# Altium PCB ESB32 with USBC PCB V1-1.PcbDoc (part 1 of 3)
Units mil, origin at the board's own origin, x right, y up, seen from the top; angles counter-clockwise.
Board outline 2700 x 1000 mil, 4 copper layers (L1, L2, L3, L4), stack 61.583 mil thick; 64 components, 73 nets, 299 pads, 161 vias.
Unrouted connection lines stored in the file: 13.
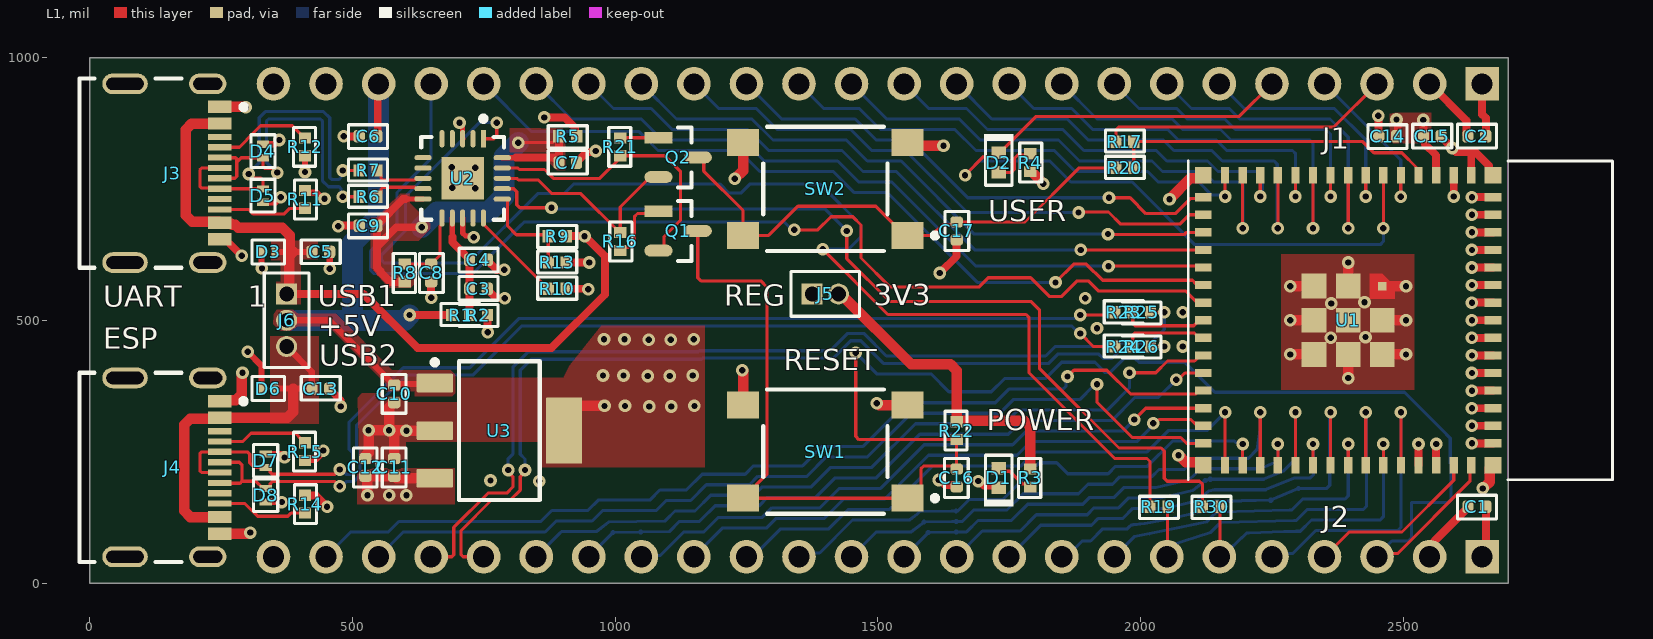
[diagram p0: L1 view]
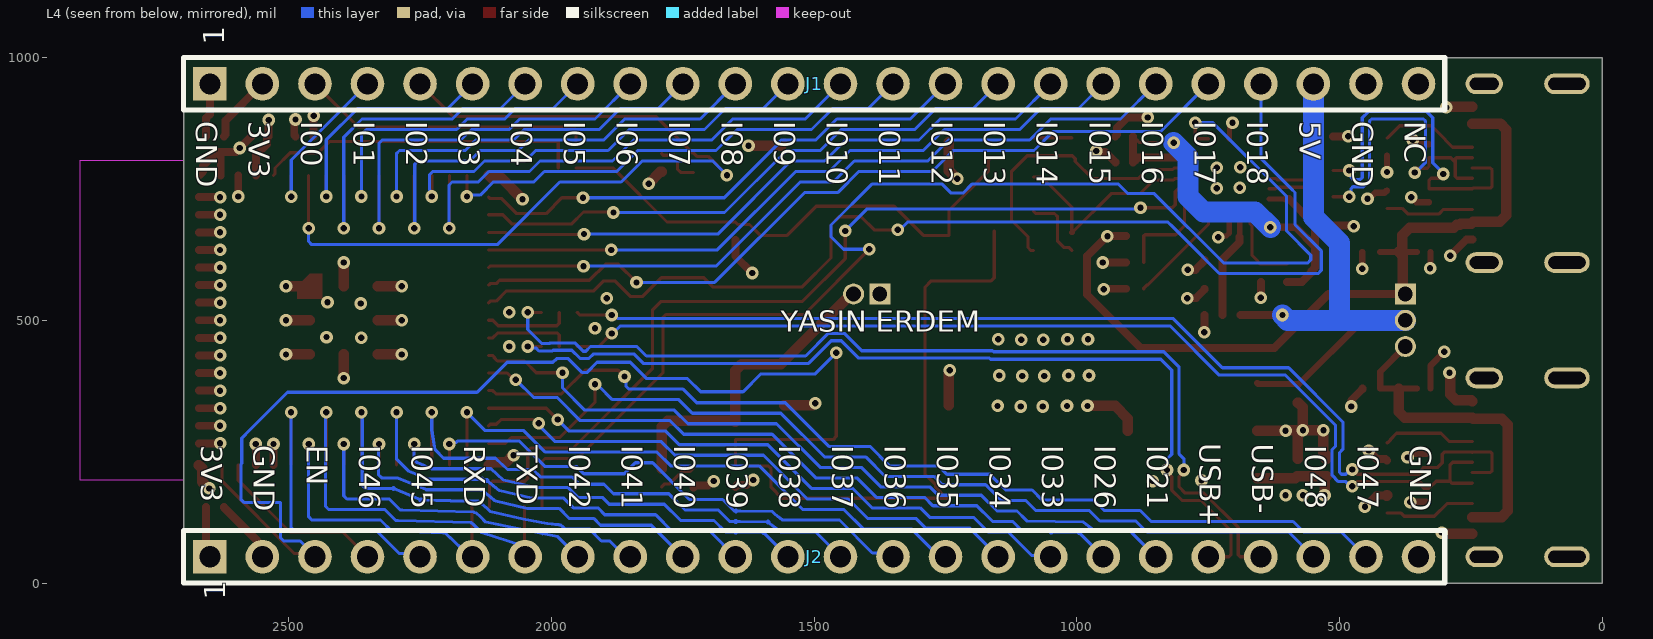
[diagram p1: L4 view, seen from below]
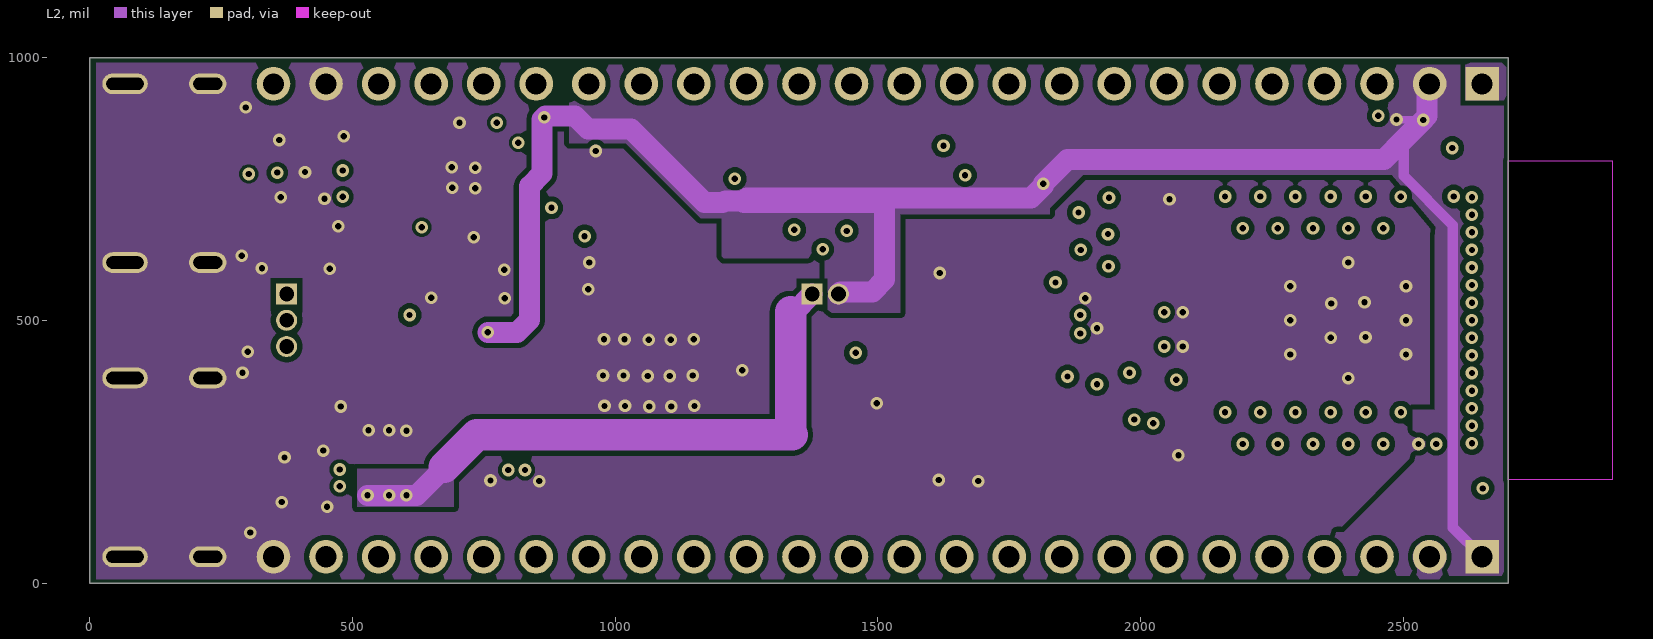
[diagram p2: L2]
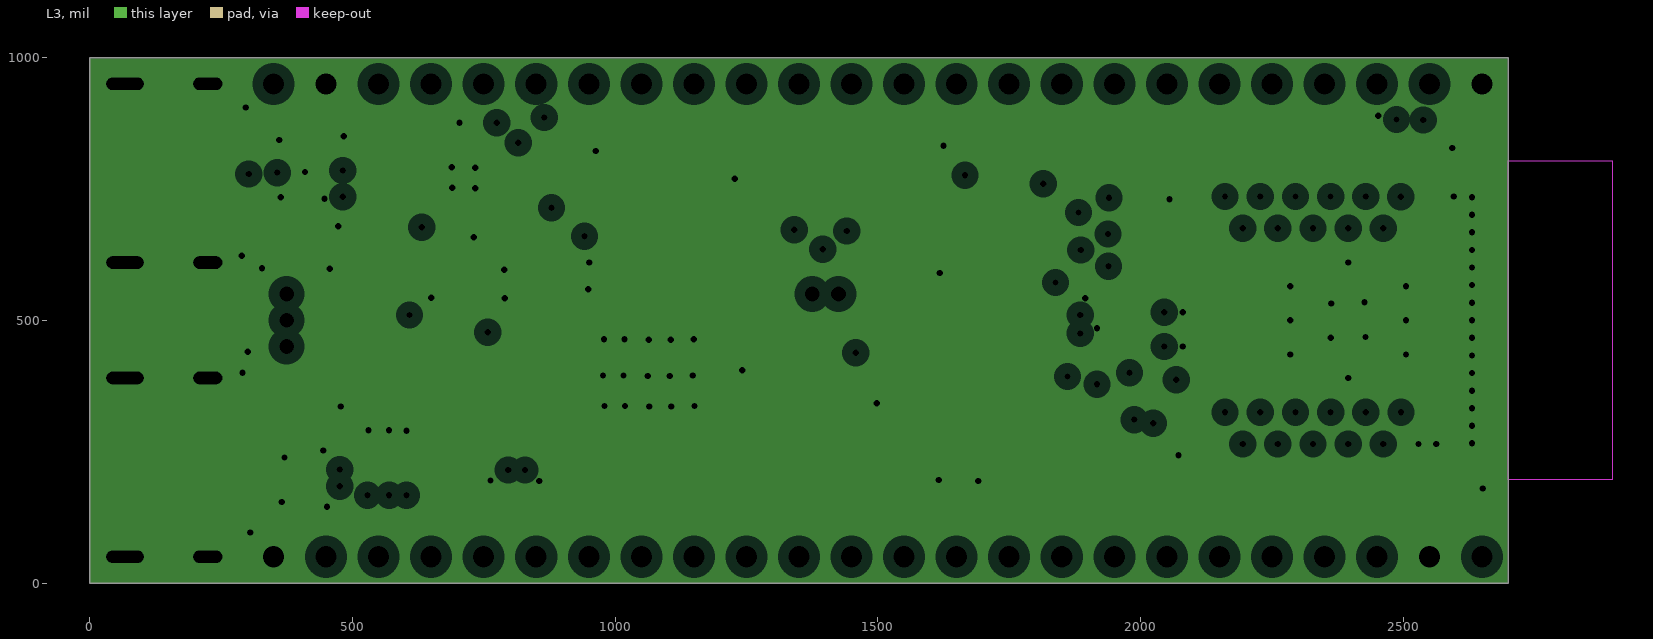
[diagram p3: L3, clearances drawn from the general rule]
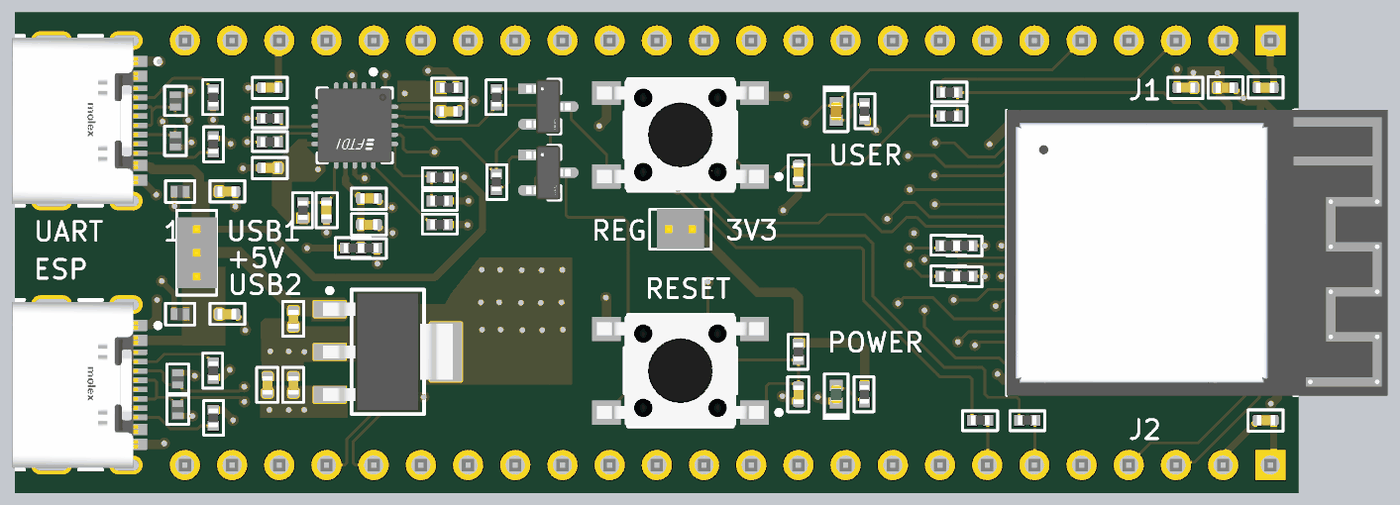
[diagram p5: 3D render of the assembled board from above, using the file's embedded part models]

## Layer stack, top to bottom
Top Solder: solder mask 0.4, Solder Resist, Dk 3.5
L1: signal copper 1.378
Dielectric 2: prepreg 3.9134, PP-006, Dk 4.1
L2: signal copper 0.5984
Dielectric 1: dielectric 49.8031, FR-4, Dk 4.8
L3: plane copper 0.5984, net GND
Dielectric 3: prepreg 3.9134, PP-006, Dk 4.1
L4: signal copper 1.378
Bottom Solder: solder mask 0.4, Solder Resist, Dk 3.5

## Board outline
0,0 2700,0 2700,1000 0,1000

## Design rules (kind name [scope] priority, off if disabled: settings)
Clearance SMALLER [WithinRoom('FTDI')    or WithinRoom('USBC2')     or WithinRoom('USBC1')] p1: gap=6 ignorepadtopadclearanceinfootprint=FALSE
Clearance "DIFF90 Clearance" [InDifferentialPairClass('DIFF90')] p2: gap=8 ignorepadtopadclearanceinfootprint=FALSE
Clearance [All] p3: gap=10 ignorepadtopadclearanceinfootprint=FALSE except(6: SMDPad-SMDPad)
ComponentClearance r24r26 [InComponent('R24') vs InComponent('R26')] p1: gap=-1 collisioncheckmode=3 verticalgap=-1 showdistances=FALSE
ComponentClearance r23r25 [InComponent('R23') vs InComponent('R25')] p2: gap=-1 collisioncheckmode=3 verticalgap=-1 showdistances=FALSE
ComponentClearance r1r2 [InComponent('R1') vs InComponent('R2')] p3: gap=-1 collisioncheckmode=3 verticalgap=-1 showdistances=FALSE
ComponentClearance [All] p4: gap=10 collisioncheckmode=3 verticalgap=10 showdistances=FALSE
DiffPairsRouting DIFF90 [InDifferentialPairClass('DIFF90')] p1: maxlimit=8.1 minlimit=8 mostfreqgap=8 toplayer_minwidth=6.03 toplayer_maxwidth=6.23 toplayer_prefwidth=6.03 midlayer1_minwidth=5.1 midlayer1_maxwidth=5.2 midlayer1_prefwidth=5.1 bottomlayer_minwidth=6.03 bottomlayer_maxwidth=6.23 bottomlayer_prefwidth=6.03 maxuncoupledlength=500
MinimumSolderMaskSliver [All] p1: minsoldermaskwidth=3.15
PlaneClearance [All] p1: clearance=20
PlaneConnect [All] p1: pad.planeconnectstyle=Relief pad.reliefexpansion=20 pad.reliefentries=4 pad.reliefconductorwidth=20 pad.reliefairgap=10 via.planeconnectstyle=Direct via.reliefexpansion=20 via.reliefentries=4 via.reliefconductorwidth=10 via.reliefairgap=10
PolygonConnect [All] p1: connectstyle=Direct reliefconductorwidth=10 reliefentries=4 polygonreliefangle="90 Angle" airgapwidth=10
RoomDefinition FTDI [False vs False] p1: confinementstyle=ConfineIn formatcopy=TRUE lockcomponents=FALSE outline 592,877 818,877 818,650 592,650
RoomDefinition USBC1 [False vs False] p2: confinementstyle=ConfineIn formatcopy=TRUE lockcomponents=FALSE outline 189,925 307,925 307,633 189,633
RoomDefinition USBC2 [False vs False] p3: confinementstyle=ConfineIn formatcopy=TRUE lockcomponents=FALSE outline 194,365 320,365 320,78 194,78
RoutingVias [All] p1: holewidth=12 width=24 viastyle="Through Hole" minholewidth=12 minwidth=24 maxholewidth=12 maxwidth=24
SilkToSilkClearance [All] p1: silktosilkclearance=6
SilkToSolderMaskClearance [IsPad] p1: minsilkscreentomaskgap=5 clearancetoexposedcopper=TRUE
SolderMaskExpansion [All] p1: expansion=2 istentingtop=FALSE
SupplyNets "Schematic Supply Nets_5" [InNet('+5VBUS_1')] p1: voltage=0.000
SupplyNets "Schematic Supply Nets_4" [InNet('+5V')] p2: voltage=0.000
SupplyNets "Schematic Supply Nets_3" [InNet('+3V3')] p3: voltage=0.000
SupplyNets "Schematic Supply Nets_2" [InNet('GND')] p4: voltage=0.000
SupplyNets "Schematic Supply Nets_1" [InNet('+5VBUS_2')] p5: voltage=0.000
SupplyNets "Schematic Supply Nets" [InNet('+3V3_REG')] p6: voltage=0.000
Width [All] p1: maxlimit=100 minlimit=6 preferedwidth=10 minimp=50.000000 maximp=50.000000 favimp=50.000000
23 further rules are at their usual default settings.

## Classes and differential pairs
differential pair class DIFF90: CON1_USB CON2_USB CON_ESP_USB ESP_USB FTDI_USB
differential pair FTDI_USB: +FTDI_USB_P -FTDI_USB_N
differential pair ESP_USB: +ESP_USB_P -ESP_USB_N
differential pair CON_ESP_USB: +CON_ESP_USB_P -CON_ESP_USB_N
differential pair CON2_USB: +CON2_USB_P -CON2_USB_N
differential pair CON1_USB: +CON1_USB_P -CON1_USB_N

## Components (designator, comment, footprint, x,y, rotation, side; value= is the part's Value field where it differs from the comment)
C1 "100nf ,50V" CAPC1005X55N 2640,145 r180 top
C2 "100nf ,50V" CAPC1005X55N 2640,850 r0 top
C3 "100nf ,50V" CAPC1005X55N 740,560 r0 top
C4 "4u7,16V" CAPC1005X55N 740,615 r180 top value=4.7uF
C5 "100nf ,50V" CAPC1005X55N 440,630 r0 top
C6 "100nf ,50V" CAPC1005X55N 530,850 r180 top
C7 "100nf ,50V" CAPC1005X55N 910,800 r0 top
C8 "100nf ,50V" CAPC1005X55N 650,590 r270 top
C9 "100nf ,50V" CAPC1005X55N 530,680 r180 top
C10 "4u7,16V" CAPC1005X55N 580,360 r90 top value=4.7uF
C11 "10uF,10V" CAPC1005X55N 580,220 r90 top value=10uF
C12 "10uF,10V" CAPC1005X55N 525,220 r90 top value=10uF
C13 "100nf ,50V" CAPC1005X55N 440,370 r0 top
C14 "100nf ,50V" CAPC1005X55N 2470,850 r180 top
C15 "10uF,10V" CAPC1005X55N 2555,850 r0 top value=10uF
C16 "1uF,35V" CAPC1005X55N 1650,200 r90 top value=1uF
C17 "100nf ,50V" CAPC1005X55N 1650,670 r270 top
D1 "GREEN" LED402G 1730,200 r90 top
D2 "RED" LED402R 1730,800 r270 top
D3 "AQ3045-01ETG" SOD882 340,630 r0 top
D4 "AQ3045-01ETG" SOD882 330,822 r270 top
D5 "AQ3045-01ETG" SOD882 330,737.2 r90 top
D6 "AQ3045-01ETG" SOD882 340,370 r0 top
D7 "AQ3045-01ETG" SOD882 335,232.8 r270 top
D8 "AQ3045-01ETG" SOD882 335,167.2 r90 top
J1 "22-28-4245" HDR_1x24_2.54MM 2650,950 r90 bottom locked
J2 "22-28-4245" HDR_1x24_2.54MM 2650,50 r90 bottom locked
J3 "217179-0001" FP-2171790001-MFG 112.8,779.92 r270 top locked
J4 "217179-0001" FP-2171790001-MFG 112.8,220.08 r270 top locked
J5 "FTS-102-01-F-S" HDR_1x2_1.27MM 1375,550 r90 top locked
J6 "FTS-103-01-F-S" HDR_1X3_1.27MM 375,550 r0 top locked
Q1 "SS8050-G" FP-SS8050-G-IPC_B 1120,670 r0 top
Q2 "SS8050-G" FP-SS8050-G-IPC_B 1120,810 r0 top
R1 "0R" RESC1005X37N 705.98,510 r0 top
R2 "0R" RESC1005X37N 740,510 r180 top
R3 "1K" RESC1005X37N 1790,200 r90 top value=1kR
R4 "1K" RESC1005X37N 1790,800 r270 top value=1kR
R5 "0R" RESC1005X37N 910,850 r180 top
R6 "27R" RESC1005X37N 530,735 r0 top
R7 "27R" RESC1005X37N 530,785 r0 top
R8 "0R" RESC1005X37N 600,590 r90 top
R9 "4k7" RESC1005X37N 890,660 r180 top value=4.7kR
R10 "10K" RESC1005X37N 890,560 r0 top value=10kR
R11 "5K1" RESC1005X37N 410,730 r270 top value=5.1kR
R12 "5K1" RESC1005X37N 410,830 r90 top value=5.1kR
R13 "10K" RESC1005X37N 890,610 r0 top value=10kR
R14 "5K1" RESC1005X37N 410,150 r270 top value=5.1kR
R15 "5K1" RESC1005X37N 410,250 r90 top value=5.1kR
R16 "10K" RESC1005X37N 1010,650 r270 top value=10kR
R17 "27R" RESC1005X37N 1970,840 r0 top
R19 "0R" RESC1005X37N 2035,145 r180 top
R20 "27R" RESC1005X37N 1970,790 r0 top
R21 "10K" RESC1005X37N 1010,830 r90 top value=10kR
R22 "10K" RESC1005X37N 1650,290 r90 top value=10kR
R23 "0R" RESC1005X37N 1967.99,515 r0 top
R24 "0R" RESC1005X37N 1967.99,450 r0 top
R25 "0R" RESC1005X37N 2001.98,515 r180 top
R26 "0R" RESC1005X37N 2002.01,450 r180 top
R30 "0R" RESC1005X37N 2135,145 r180 top
SW1 "PTS645SH50SMTR92LFS" FP-PTS645SH50SMTR92LFS-MFG 1400,250 r180 top locked
SW2 "PTS645SH50SMTR92LFS" FP-PTS645SH50SMTR92LFS-MFG 1400,750 r180 top locked
U1 "ESP32-S3-MINI-1-N8" XCVR_ESP32-S3-MINI-1-N8 2395.04,500 r270 top
U2 "FT231XQ-R" FP-QFN-20-IPC_B 710,770 r270 top locked
U3 "TL1963A-33DCYR" DCY0004A_N 780,290 r0 top locked

## Footprints (in the part's own frame and the unit in brackets; to place one, negate y for a bottom-side part, rotate by r counter-clockwise, add the part's x,y. Pads: shape width x height; smd on the part's side, far side on the other; paste and mask are expansions set on the pad)
CAPC1005X55N [mm]
  rrect53% 0.54x0.6 smd: 1(-0.43,0) 2(0.43,0)
  silkscreen extent -0.94,-0.56 0.94,0.58, body extent -0.53,-0.28 0.47,0.27, height 0.5
DCY0004A_N [mm] "SOT223, 4-Leads, Body 6.7x3.7mm, Pitch 2.3mm, IPC Medium Density"
  rrect11% 1.75x0.9 smd: 1(-3.125,2.3) 2(-3.125,0) 3(-3.125,-2.3)
  rrect6% 1.75x3.2 smd: 4(3.125,0)
  silkscreen extent -3.25,-3.35 1.95,3.42, body extent -3.5,-3.25 3.5,3.25, height 1.62
FP-2171790001-MFG [mm]
  rect 0.6x1.15 smd paste+0 mask+0: A1B12(-3.2,3.425) A4B9(-2.4,3.425) B1A12(3.2,3.425) B4A9(2.4,3.425)
  rect 0.3x1.15 smd paste+0 mask+0: A5(-1.25,3.425) A6(-0.25,3.425) A7(0.25,3.425) A8(1.25,3.425) B5(1.75,3.425) B6(0.75,3.425) B7(-0.75,3.425) B8(-1.75,3.425)
  rrect100% 1x1.8 hole 1.4 slot 0.6 at 0 deg paste-2539.97 mask+0: S1(-4.32,2.85) S2(4.32,2.85)
  rrect100% 1x2.2 hole 1.8 slot 0.6 at 0 deg paste-2539.97 mask+0: S3(-4.32,-1.15) S4(4.32,-1.15)
  silkscreen extent -4.57,-3.35 4.57,4.7, body extent -4.92,-3.45 4.92,4.1, height 0.25
FP-PTS645SH50SMTR92LFS-MFG [mm]
  rect 1.55x1.3 smd paste+0 mask+0: 1(-3.975,2.25) 2(3.975,2.25) 3(-3.975,-2.25) 4(3.975,-2.25)
  silkscreen extent -5.43,-3 3,3, body extent -4.5,-3 4.5,3, height 4.3
FP-QFN-20-IPC_B [mm]
  rect 0.84x0.242 smd paste+0 mask+0: 1(-1.916,1)
  rrect100% 0.84x0.242 smd paste+0 mask+0: 2(-1.916,0.5) 3(-1.916,0) 4(-1.916,-0.5) 5(-1.916,-1) 11(1.916,-1) 12(1.916,-0.5) 13(1.916,0) 14(1.916,0.5) 15(1.916,1)
  rrect100% 0.242x0.84 smd paste+0 mask+0: 6(-1,-1.916) 7(-0.5,-1.916) 8(0,-1.916) 9(0.5,-1.916) 10(1,-1.916) 16(1,1.916) 17(0.5,1.916) 18(0,1.916) 19(-0.5,1.916) 20(-1,1.916)
  rect 2.05x2.05 smd paste-1000 mask+0: 21(0,0)
  silkscreen extent -3.01,-2 2,2, body extent -2.59,-2.59 2.59,2.59, height 0.25
FP-SS8050-G-IPC_B [mm]
  rect 1.357x0.572 smd paste+0 mask+0: 1(-0.951,0.95)
  rrect100% 1.357x0.572 smd paste+0 mask+0: 2(-0.951,-0.95) 3(0.951,0)
  silkscreen extent 0,-1.45 0.65,1.45, body extent -1.88,-1.7 1.88,1.7, height 0.25
HDR_1x2_1.27MM [mil]
  rect 40x40 hole 28: 1(0,0)
  round 40 hole 28: 2(0,-50)
  silkscreen extent -42,-90 43,40, body extent -42,-75 43,25, height 154
HDR_1X3_1.27MM [mil]
  rect 40x40 hole 28: 1(0,0)
  round 40 hole 28: 2(0,-50) 3(0,-100)
  silkscreen extent -42,-140 42,40, body extent -42,-125 42,25, height 155
HDR_1x24_2.54MM [mil]
  rect 64x64 hole 40: 1(0,0)
  round 64 hole 40: 2(0,-100) 3(0,-200) 4(0,-300) 5(0,-400) 6(0,-500) 7(0,-600) 8(0,-700) 9(0,-800) 10(0,-900) 11(0,-1000) 12(0,-1100) 13(0,-1200) 14(0,-1300) 15(0,-1400) 16(0,-1500) 17(0,-1600) 18(0,-1700) 19(0,-1800) 20(0,-1900) 21(0,-2000) 22(0,-2100) 23(0,-2200) 24(0,-2300)
  silkscreen extent -50,-2350 50,50, body extent -49,-2350 49,50, height 371
LED402G [mm]
  rect 0.6x0.7 smd: 1(-0.475,0) 2(0.475,0)
  silkscreen extent -1.37,-0.71 1.09,0.71, body extent -0.5,-0.3 0.5,0.3, height 0.2
LED402R [mm]
  rect 0.6x0.7 smd: 1(-0.475,0) 2(0.475,0)
  silkscreen extent -1.37,-0.71 1.09,0.71, body extent -0.5,-0.3 0.5,0.3, height 0.2
RESC1005X37N [mm]
  rect 0.54x0.6 smd: 1(-0.432,0) 2(0.432,0)
  silkscreen extent -0.94,-0.51 0.94,0.56, body extent -0.5,-0.25 0.5,0.25, height 0.37
SOD882 [mm]
  rect 0.35x0.6 smd: 1(-0.325,0) 2(0.325,0)
  silkscreen extent -0.79,-0.58 0.79,0.58, body extent -0.54,-0.34 0.54,0.34
XCVR_ESP32-S3-MINI-1-N8 [mm]
  rect 0.8x0.4 smd: 1(-7,5.95) 2(-7,5.1) 3(-7,4.25) 4(-7,3.4) 5(-7,2.55) 6(-7,1.7) 7(-7,0.85) 8(-7,0) 9(-7,-0.85) 10(-7,-1.7) 11(-7,-2.55) 12(-7,-3.4) 13(-7,-4.25) 14(-7,-5.1) 15(-7,-5.95) 31(7,-5.95) 32(7,-5.1) 33(7,-4.25) 34(7,-3.4) 35(7,-2.55) 36(7,-1.7) 37(7,-0.85) 38(7,0) 39(7,0.85) 40(7,1.7) 41(7,2.55) 42(7,3.4) 43(7,4.25) 44(7,5.1) 45(7,5.95)
  rect 0.4x0.8 smd: 16(-5.95,-7) 17(-5.1,-7) 18(-4.25,-7) 19(-3.4,-7) 20(-2.55,-7) 21(-1.7,-7) 22(-0.85,-7) 23(0,-7) 24(0.85,-7) 25(1.7,-7) 26(2.55,-7) 27(3.4,-7) 28(4.25,-7) 29(5.1,-7) 30(5.95,-7) 46(5.95,7) 47(5.1,7) 48(4.25,7) 49(3.4,7) 50(2.55,7) 51(1.7,7) 52(0.85,7) 53(0,7) 54(-0.85,7) 55(-1.7,7) 56(-2.55,7) 57(-3.4,7) 58(-4.25,7) 59(-5.1,7) 60(-5.95,7)
  rect 1.2x1.2 smd: 61(0,0) 67(0,1.65) 68(1.65,1.65) 69(-1.65,0) 70(1.65,0) 71(-1.65,-1.65) 72(0,-1.65) 73(1.65,-1.65)
  rect 0.8x0.8 smd: 62(-7,7) 63(-7,-7) 64(7,-7) 65(7,7)
  rect 0.4x0.4 smd paste-1 mask+0: 66(-1.65,1.65)
  L1 region: -1.05,1.05 -2.25,1.05 -2.25,1.65 -1.65,2.25 -1.05,2.25
  Keep-Out Layer region: 7.7,7.725 -7.7,7.725 -7.7,12.775 7.7,12.775
  Keep-Out Layer region: 7.7,7.725 -7.7,7.725 -7.7,12.775 7.7,12.775
  silkscreen extent -7.7,-7.73 7.7,12.78, body extent -7.7,-7.73 7.7,12.78, height 2.55

## Part data
C1 C2 C3 C5 C6 C7 C8 C9 C13 C14 C17: library part CL05B104KB54PNC, "CAP CER 0.1UF 50V X7R 0402", Capacitor Type=Ceramic, LCSC Part number=C307331, Manufacturer=Samsung, Supplier Part Number=1276-CL05B104KB54PNCCT-ND, Category="Ceramic Capacitors", ComponentLink1Description=https://datasheet.ciiva.com:443/pdfs/VipMasterIC/IC/SEMS/SEMS-S-A0006318249/SEMS-S-A0006320959-1.pdf?src-supplier=IHS+Markit, ComponentLink1URL=https://datasheet.ciiva.com:443/pdfs/VipMasterIC/IC/SEMS/SEMS-S-A0006318249/SEMS-S-A0006320959-1.pdf?src-supplier=IHS+Markit, Dielectric Material=Ceramic, Manufacturer Part Number=CL05B104KB54PNC, Pins=2, Pricing="1=0,1, 10=0,036, 50=0,0246, 100=0,021, 500=0,01504, 1000=0,01323, 2500=0,01132, 5000=0,01018, 10000=0,00759, 20000=0,00645, 30000=0,00641, 50000=0,00637, 70000=0,00634, 100000=0,00632, 120000=0,00631, 240000=0,00626, 250000=0,00626 (USD)", Reach SVHC Compliant=Yes, RoHS=Yes, RoHS Compliant=Yes, Supplier=Digikey
C4 C10: library part CL05A475MO5NUNC, "CAP CER 4.7UF 16V X5R 0402", Capacitor Type=Ceramic, Case/Package=0402, LCSC Part number=C318563, Manufacturer=Samsung, Max Operating Temperature=85°C, Min Operating Temperature=-55°C, Package Shape=Rectangular, Package Style=SMTMeter, Rated DC Voltage (URdc)=16V, Supplier Part Number=1276-6836-1-ND, Temperature Characteristics Code=X5R, Tolerance  (fill in as +-)=20%, Category="Ceramic Capacitors", ComponentLink1Description=https://datasheet.ciiva.com:443/pdfs/VipMasterIC/IC/SEMS/SEMS-S-A0008384515/SEMS-S-A0008898881-1.pdf?src-supplier=IHS+Markit, ComponentLink1URL=https://datasheet.ciiva.com:443/pdfs/VipMasterIC/IC/SEMS/SEMS-S-A0008384515/SEMS-S-A0008898881-1.pdf?src-supplier=IHS+Markit, ComponentLink2Description=http://www.farnell.com/datasheets/2710653.pdf?src-supplier=Farnell, ComponentLink2URL=http://www.farnell.com/datasheets/2710653.pdf?src-supplier=Farnell, ComponentLink3Description=http://www.samsungsem.com/kr/support/product-search/mlcc/CL05A475MO5NUNC.jsp?src-supplier=Digikey, ComponentLink3URL=http://www.samsungsem.com/kr/support/product-search/mlcc/CL05A475MO5NUNC.jsp?src-supplier=Digikey, ComponentLink4Description=http://www.farnell.com/datasheets/2710653.pdf?src-supplier=Newark, ComponentLink4URL=http://www.farnell.com/datasheets/2710653.pdf?src-supplier=Newark, ComponentLink5Description=http://www.farnell.com/datasheets/2710653.pdf?src-supplier=Element14, ComponentLink5URL=http://www.farnell.com/datasheets/2710653.pdf?src-supplier=Element14, ComponentLink6Description=https://datasheet.octopart.com/CL05A475MO5NUNC-Samsung-Electro-Mechanics-datasheet-123102911.pdf?src-supplier=Future+Electronics, ComponentLink6URL=https://datasheet.octopart.com/CL05A475MO5NUNC-Samsung-Electro-Mechanics-datasheet-123102911.pdf?src-supplier=Future+Electronics, Dielectric Material=Ceramic, Height=0.7mm, JESD-609 Code=e3, Length=1mm, Manufacturer Part Number=CL05A475MO5NUNC, Mounting Technology="Surface Mount", Multilayer=Yes, Packaging="Tape and Reel", Pins=2, Pricing="1=0,14, 10=0,088, 50=0,085 (USD)", Reach SVHC Compliant=Yes, RoHS=Yes, RoHS Compliant=Yes, Stock=13551, Supplier=Digikey, Terminal Finish=Nickel, Termination=Wraparound, Tolerance (fill in as +-)=20%, Width=0.5mm
C11 C12 C15: library part CL05A106MP8NUB8, "CAP CER 10UF 10V X5R 0402", Capacitor Type=Ceramic, Case/Package=0402, LCSC Part number=C307415, Manufacturer=Samsung, Max Operating Temperature=85°C, Min Operating Temperature=-55°C, Package Shape=Rectangular, Rated DC Voltage (URdc)=10V, Supplier Part Number=1276-6830-1-ND, Temperature Characteristics Code=X5R, Tolerance  (fill in as +-)=20%, Category="Ceramic Capacitors", ComponentLink1Description=https://datasheet.ciiva.com:443/pdfs/VipMasterIC/IC/SEMS/SEMS-S-A0008521219/SEMS-S-A0008521325-1.pdf?src-supplier=IHS+Markit, ComponentLink1URL=https://datasheet.ciiva.com:443/pdfs/VipMasterIC/IC/SEMS/SEMS-S-A0008521219/SEMS-S-A0008521325-1.pdf?src-supplier=IHS+Markit, ComponentLink2Description=http://www.samsungsem.com/kr/support/product-search/mlcc/CL05A106MP8NUB8.jsp?src-supplier=Digikey, ComponentLink2URL=http://www.samsungsem.com/kr/support/product-search/mlcc/CL05A106MP8NUB8.jsp?src-supplier=Digikey, ComponentLink3Description=https://datasheet.octopart.com/CL05A106MP8NUB8-Samsung-Electro-Mechanics-datasheet-136460857.pdf?src-supplier=Future+Electronics, ComponentLink3URL=https://datasheet.octopart.com/CL05A106MP8NUB8-Samsung-Electro-Mechanics-datasheet-136460857.pdf?src-supplier=Future+Electronics, Dielectric Material=Ceramic, JESD-609 Code=e3, Manufacturer Part Number=CL05A106MP8NUB8, Mounting Technology="Surface Mount", Multilayer=Yes, Packaging="Tape and Reel", Pins=2, Pricing="1=0,13, 10=0,077, 50=0,0678, 8000=0,0584 (USD)", Reach SVHC Compliant=Yes, RoHS=Yes, RoHS Compliant=Yes, Supplier=Digikey, Terminal Finish=Nickel, Termination=Wraparound, Tolerance (fill in as +-)=20%
C16: library part CL05A105KL5NRNC, "CAP CER 1UF 35V X5R 0402", Capacitor Type=Ceramic, Case/Package=0402, LCSC Part number=C307413, Manufacturer=Samsung, Max Operating Temperature=85°C, Min Operating Temperature=-55°C, Package Shape=Rectangular, Rated DC Voltage (URdc)=35V, Supplier Part Number=1276-6796-1-ND, Temperature Characteristics Code=X5R, Tolerance  (fill in as +-)=10%, Category="Ceramic Capacitors", ComponentLink1Description=https://datasheet.ciiva.com:443/pdfs/VipMasterIC/IC/SEMS/SEMS-S-A0008384515/SEMS-S-A0008872905-1.pdf?src-supplier=IHS+Markit, ComponentLink1URL=https://datasheet.ciiva.com:443/pdfs/VipMasterIC/IC/SEMS/SEMS-S-A0008384515/SEMS-S-A0008872905-1.pdf?src-supplier=IHS+Markit, ComponentLink2Description=http://www.samsungsem.com/kr/support/product-search/mlcc/CL05A105KL5NRNC.jsp?src-supplier=Digikey, ComponentLink2URL=http://www.samsungsem.com/kr/support/product-search/mlcc/CL05A105KL5NRNC.jsp?src-supplier=Digikey, ComponentLink3Description=https://datasheet.octopart.com/CL05A105KL5NRNC-Samsung-datasheet-8326407.pdf?src-supplier=TME, ComponentLink3URL=https://datasheet.octopart.com/CL05A105KL5NRNC-Samsung-datasheet-8326407.pdf?src-supplier=TME, Dielectric Material=Ceramic, JESD-609 Code=e3, Manufacturer Part Number=CL05A105KL5NRNC, Mounting Technology="Surface Mount", Multilayer=Yes, Packaging="Tape and Reel", Pins=2, Pricing="1=0,28, 10=0,163, 50=0,118, 100=0,1042, 500=0,08014, 1000=0,0741, 2500=0,06662, 5000=0,0622, 10000=0,0584, 20000=0,05535, 30000=0,05382, 50000=0,05293 (USD)", Reach SVHC Compliant=Yes, RoHS=Yes, RoHS Compliant=Yes, Stock=96244, Supplier=Digikey, Terminal Finish=Nickel, Termination=Wraparound, Tolerance (fill in as +-)=10%
D1: library part VLMTG1500-GS08, "LED GREEN 0402 SMD", LCSC Part number=C20346084, Manufacturer=Vishay, Supplier Part Number=751-VLMTG1500-GS08CT-ND, Category=LEDs, ComponentLink1Description=https://datasheet.ciiva.com:443/pdfs/VipMasterIC/IC/VISH/VISH-S-A0003457490/VISH-S-A0003457490-1.pdf?src-supplier=IHS+Markit, ComponentLink1URL=https://datasheet.ciiva.com:443/pdfs/VipMasterIC/IC/VISH/VISH-S-A0003457490/VISH-S-A0003457490-1.pdf?src-supplier=IHS+Markit, Manufacturer Part Number=VLMTG1500-GS08, Optoelectronic Device Type="SINGLE COLOR LED", Pricing="1=0,32, 10=0,22, 100=0,1552, 500=0,12584, 1000=0,11615 (USD)", RoHS=Yes, RoHS Compliant=Yes, Supplier=Digikey
D2: library part VLMS1500-GS08, "LED RED 0402 SMD", Case Code (Metric)=1005, Case Code (Imperial)=0402, Color=Red, Forward Current=30mA, Forward Voltage=2V, LCSC Part number=C511370, Manufacturer=Vishay, Max Operating Temperature=85°C, Min Operating Temperature=-30°C, Package Quantity=9000, Power Rating=75mW, Supplier Part Number=VLMS1500-GS08CT-ND, Test Current=20mA, Case/Package=0402, Category=LEDs, ComponentLink1Description=http://components.arrow.com/part/dataview/56357384S461524N5680?src-supplier=Arrow+Electronics, ComponentLink1URL=http://components.arrow.com/part/dataview/56357384S461524N5680?src-supplier=Arrow+Electronics, ComponentLink2Description=http://www.mouser.com/ds/2/427/vlmo1500-244705.pdf?src-supplier=Mouser, ComponentLink2URL=http://www.mouser.com/ds/2/427/vlmo1500-244705.pdf?src-supplier=Mouser, ComponentLink3Description=http://www.farnell.com/datasheets/1809983.pdf?src-supplier=Farnell, ComponentLink3URL=http://www.farnell.com/datasheets/1809983.pdf?src-supplier=Farnell, ComponentLink4Description=http://www.alliedelec.com/m/d/cfc385e1097fc985ee9a50a3551ac188.pdf?src-supplier=Allied+Electronics, ComponentLink4URL=http://www.alliedelec.com/m/d/cfc385e1097fc985ee9a50a3551ac188.pdf?src-supplier=Allied+Electronics, ComponentLink5Description=https://datasheet.octopart.com/VLMS1500-GS08-Vishay-datasheet-62332426.pdf?src-supplier=Newark, ComponentLink5URL=https://datasheet.octopart.com/VLMS1500-GS08-Vishay-datasheet-62332426.pdf?src-supplier=Newark, ComponentLink6Description=http://www.vishay.com/docs/82554/vlmo1500.pdf?src-supplier=Avnet, ComponentLink6URL=http://www.vishay.com/docs/82554/vlmo1500.pdf?src-supplier=Avnet, ComponentLink7Description=https://datasheet.octopart.com/VLMS1500-GS08-Vishay-datasheet-21227148.pdf?src-supplier=Future+Electronics, ComponentLink7URL=https://datasheet.octopart.com/VLMS1500-GS08-Vishay-datasheet-21227148.pdf?src-supplier=Future+Electronics, ComponentLink8Description=http://www.farnell.com/datasheets/2050839.pdf?src-supplier=Newark, ComponentLink8URL=http://www.farnell.com/datasheets/2050839.pdf?src-supplier=Newark, ComponentLink9Description=http://www.farnell.com/datasheets/1809983.pdf?src-supplier=Element14, ComponentLink9URL=http://www.farnell.com/datasheets/1809983.pdf?src-supplier=Element14, ComponentLink10Description=https://datasheet.octopart.com/VLMS1500-GS08-Vishay-datasheet-33014519.pdf?src-supplier=Element14, ComponentLink10URL=https://datasheet.octopart.com/VLMS1500-GS08-Vishay-datasheet-33014519.pdf?src-supplier=Element14, ComponentLink11Description=http://www.farnell.com/datasheets/1809983.pdf?src-supplier=Newark, ComponentLink11URL=http://www.farnell.com/datasheets/1809983.pdf?src-supplier=Newark, ComponentLink12Description=http://datasheet.octopart.com/VLMS1500-GS08-Vishay-datasheet-21227148.pdf?src-supplier=Avnet, ComponentLink12URL=http://datasheet.octopart.com/VLMS1500-GS08-Vishay-datasheet-21227148.pdf?src-supplier=Avnet, ComponentLink13Description=http://datasheet.octopart.com/VLMS1500-GS08-Vishay-datasheet-21227148.pdf?src-supplier=LCSC, ComponentLink13URL=http://datasheet.octopart.com/VLMS1500-GS08-Vishay-datasheet-21227148.pdf?src-supplier=LCSC, ComponentLink14Description=http://datasheet.octopart.com/VLMS1500-GS08-Vishay-datasheet-21227148.pdf?src-supplier=Quest, ComponentLink14URL=http://datasheet.octopart.com/VLMS1500-GS08-Vishay-datasheet-21227148.pdf?src-supplier=Quest, ComponentLink15Description=http://datasheet.octopart.com/VLMS1500-GS08-Vishay-datasheet-21227148.pdf?src-supplier=NAC+Semi, ComponentLink15URL=http://datasheet.octopart.com/VLMS1500-GS08-Vishay-datasheet-21227148.pdf?src-supplier=NAC+Semi, Dominant Wavelength=631nm, Height=0.55mm, Lead Free="Lead Free", Length=1mm, Lens Size=0.5mm, Lens Style=Flat,Rectangular,Square, Luminous Intensity=54mcd, Manufacturer Part Number=VLMS1500-GS08, Mounting Technology="Surface Mount", Number of LEDs=1, Packaging="Tape and Reel", Pins=2, Pricing="1=0,24, 10=0,164, 100=0,1147, 500=0,09218, 1000=0,0847 (USD)", Radiation Hardening=No, Reach SVHC Compliant=Unknown, RoHS=Yes, RoHS Compliant=Yes, Series=CHipLED, Supplier=Digikey, Viewing Angle=130°, Wavelength=631nm, Width=0.5mm, Illumination Color=Red
D3 D4 D5 D6 D7 D8: "TVS DIODE 5.3VWM 12VC SOD882", LCSC Part number=C3710326, Manufacturer=Littelfuse, Max Breakdown Voltage=9V, Max Operating Temperature=150°C, Min Breakdown Voltage=6.8V, Min Operating Temperature=-55°C, Non-rep Peak Rev Power Dis-Max=40W, Package Body Material=Plastic, Package Shape=Rectangular, Package Style="CHIP CARRIERMeter", Rep Pk Reverse Voltage-Max=5.3V, Supplier Part Number=F9321CT-ND, Category="TVS Diodes", ComponentLink1Description=https://datasheet.ciiva.com:443/pdfs/VipMasterIC/IC/LFSI/LFSI-S-A0007892042/LFSI-S-A0007892042-1.pdf?src-supplier=IHS+Markit, ComponentLink1URL=https://datasheet.ciiva.com:443/pdfs/VipMasterIC/IC/LFSI/LFSI-S-A0007892042/LFSI-S-A0007892042-1.pdf?src-supplier=IHS+Markit, ComponentLink2Description=https://www.littelfuse.com/~/media/electronics/datasheets/tvs_diode_arrays/littelfuse_tvs_diode_array_aq3045_datasheet.pdf.pdf?src-supplier=Digikey, ComponentLink2URL=https://www.littelfuse.com/~/media/electronics/datasheets/tvs_diode_arrays/littelfuse_tvs_diode_array_aq3045_datasheet.pdf.pdf?src-supplier=Digikey, ComponentLink3Description=http://www.littelfuse.com/~/media/electronics/datasheets/tvs_diode_arrays/littelfuse_tvs_diode_array_aq3045_datasheet.pdf.pdf?src-supplier=Digikey, ComponentLink3URL=http://www.littelfuse.com/~/media/electronics/datasheets/tvs_diode_arrays/littelfuse_tvs_diode_array_aq3045_datasheet.pdf.pdf?src-supplier=Digikey, Diode Element Material=SILICON, Diode Type="TRANS VOLTAGE SUPPRESSOR", Manufacturer Part Number=AQ3045-01ETG, Number of Elements=1, Pins=2, Polarity=Bidirectional, Pricing="1=0,45, 10=0,29, 100=0,141, 500=0,134 (USD)", Reach SVHC Compliant=Yes, Reference Standard=AEC-Q101, RoHS=Yes, RoHS Compliant=Yes, Stock=17306, Supplier=Digikey, Surface Mount=Yes, Technology=AVALANCHE, Terminal Form="No Lead", Terminal Position=BOTTOM
J1 J2: "CONN HEADER VERT 24POS 2.54MM", LCSC Part number=C7145888, Manufacturer=Molex, Supplier Part Number=900-0022284245-ND, Category="Headers and Wire Housings", ComponentLink1Description=https://datasheet.ciiva.com/6814/022284363-sd-6814049.pdf?src-supplier=Digikey, ComponentLink1URL=https://datasheet.ciiva.com/6814/022284363-sd-6814049.pdf?src-supplier=Digikey, ComponentLink2Description=https://datasheet.ciiva.com/10075/0022284245-pcb-headers-10075617.pdf?src-supplier=Avnet, ComponentLink2URL=https://datasheet.ciiva.com/10075/0022284245-pcb-headers-10075617.pdf?src-supplier=Avnet, ComponentLink3Description=https://datasheet.ciiva.com/1433/1597854-1433759.pdf?src-supplier=Element14, ComponentLink3URL=https://datasheet.ciiva.com/1433/1597854-1433759.pdf?src-supplier=Element14, Manufacturer Part Number=22-28-4245, Pricing="1=1,21, 10=1,024, 100=0,8699, 500=0,77638, 1000=0,73932, 5000=0,65998, 10000=0,62851 (USD)", RoHS=No, Stock=1536, Supplier=Digikey
J3 J4: "CONN RCP USB2.0 TYP C 24P SMD RA", LCSC Part number=C138021, Manufacturer=Molex, Supplier Part Number=900-2171790001CT-ND, Category=Connectors, Manufacturer Part Number=217179-0001, Pricing="1=0,83, 10=0,704, 25=0,6596, 50=0,628, 100=0,598, 250=0,56052, 500=0,53374, 1200=0,50175, 2400=0,4778, 3600=0,46433, 6000=0,4479, 8400=0,4374, 12000=0,42654 (USD)", RoHS=No, Stock=15804, Supplier=Digikey
J5: "CONN HEADER VERT 2POS 1.27MM", Flammability Rating="UL94 V-0", LCSC Part number=C6045317, Manufacturer=Samtec, Manufacturer Series=FTS, Supplier Part Number=SAM15176-ND, Additional Feature="Low Profile", Category=Connectors, ComponentLink1Description=https://datasheet.ciiva.com:443/pdfs/VipMasterIC/IC/SAMI/SAMI-S-A0001504673/SAMI-S-A0001504673-1.pdf?src-supplier=IHS+Markit, ComponentLink1URL=https://datasheet.ciiva.com:443/pdfs/VipMasterIC/IC/SAMI/SAMI-S-A0001504673/SAMI-S-A0001504673-1.pdf?src-supplier=IHS+Markit, ComponentLink2Description=http://www.samtec.com/documents/webfiles/pdf/FTS.pdf?src-supplier=Avnet, ComponentLink2URL=http://www.samtec.com/documents/webfiles/pdf/FTS.pdf?src-supplier=Avnet, ComponentLink3Description=https://datasheet.octopart.com/FTS-102-01-F-S-Samtec-datasheet-118493358.pdf?src-supplier=Electro+Sonic, ComponentLink3URL=https://datasheet.octopart.com/FTS-102-01-F-S-Samtec-datasheet-118493358.pdf?src-supplier=Electro+Sonic, Connector Type="BOARD CONNECTOR", Contact Finish - Mating="GOLD (3) OVER NICKEL (50)", Contact Finish - Termination="Matte Tin (Sn) - with Nickel (Ni) barrier", Contact Gender=Male, Contact Material=Bronze, DIN Conformance=No, Filter Feature=No, JESD-609 Code=e3, Manufacturer Part Number=FTS-102-01-F-S, Mixed Contacts=No, Mounting Style=STRAIGHT, Mounting Technology=Board, MIL Conformance=No, Number of Contacts=2, Number of Rows Loaded=1, Option="General Purpose", Pricing="1=0,49, 50=0,4252, 100=0,3608, 500=0,2994, 1000=0,25609, 2000=0,252 (USD)", Reach SVHC Compliant=Yes, RoHS=Yes, RoHS Compliant=Yes, Stock=547, Supplier=Digikey, Terminal Pitch=1.27mm, Termination=Solder, IEC Conformance=No
J6: "CONN HEADER VERT 3POS 1.27MM", Flammability Rating="UL94 V-0", LCSC Part number=C3333578, Manufacturer=Samtec, Manufacturer Series=FTS, Supplier Part Number=612-FTS-103-01-F-S-ND, Additional Feature="Low Profile", Category=Connectors, ComponentLink1Description=https://datasheet.ciiva.com:443/pdfs/VipMasterIC/IC/SAMI/SAMI-S-A0001504673/SAMI-S-A0001504673-1.pdf?src-supplier=IHS+Markit, ComponentLink1URL=https://datasheet.ciiva.com:443/pdfs/VipMasterIC/IC/SAMI/SAMI-S-A0001504673/SAMI-S-A0001504673-1.pdf?src-supplier=IHS+Markit, ComponentLink2Description=http://suddendocs.samtec.com/prints/fts-1xx-xx-xx-xx-xx-mkt.pdf?src-supplier=Digikey, ComponentLink2URL=http://suddendocs.samtec.com/prints/fts-1xx-xx-xx-xx-xx-mkt.pdf?src-supplier=Digikey, ComponentLink3Description=http://www.samtec.com/documents/webfiles/pdf/FTS.pdf?src-supplier=Avnet, ComponentLink3URL=http://www.samtec.com/documents/webfiles/pdf/FTS.pdf?src-supplier=Avnet, ComponentLink4Description=https://datasheet.octopart.com/FTS-103-01-F-S-Samtec-datasheet-116535195.pdf?src-supplier=Toby+Electronics, ComponentLink4URL=https://datasheet.octopart.com/FTS-103-01-F-S-Samtec-datasheet-116535195.pdf?src-supplier=Toby+Electronics, ComponentLink5Description=https://datasheet.octopart.com/FTS-103-01-F-S-Samtec-datasheet-151470456.pdf?src-supplier=Sager+Electronics, ComponentLink5URL=https://datasheet.octopart.com/FTS-103-01-F-S-Samtec-datasheet-151470456.pdf?src-supplier=Sager+Electronics, ComponentLink6Description=https://datasheet.octopart.com/FTS-103-01-F-S-Samtec-datasheet-118493358.pdf?src-supplier=Electro+Sonic, ComponentLink6URL=https://datasheet.octopart.com/FTS-103-01-F-S-Samtec-datasheet-118493358.pdf?src-supplier=Electro+Sonic, Connector Type="BOARD CONNECTOR", Contact Finish - Mating="GOLD (3) OVER NICKEL (50)", Contact Finish - Termination="Matte Tin (Sn) - with Nickel (Ni) barrier", Contact Gender=Male, Contact Material=Bronze, DIN Conformance=No, Filter Feature=No, JESD-609 Code=e3, Manufacturer Part Number=FTS-103-01-F-S, Mixed Contacts=No, Mounting Style=STRAIGHT, Mounting Technology=Board, MIL Conformance=No, Number of Contacts=3, Number of Rows Loaded=1, Option="General Purpose", Pricing="1=0,73, 50=0,6378, 100=0,5407, 500=0,4491, 1000=0,38362, 2000=0,31431, 5000=0,29982 (USD)", Reach SVHC Compliant=Yes, RoHS=Yes, RoHS Compliant=Yes, Stock=2757, Supplier=Digikey, Terminal Pitch=1.27mm, Termination=Solder, IEC Conformance=No
Q1 Q2: "TRANS NPN 25V 1.5A SOT-23-3", LCSC Part number=C164886, Manufacturer=Comchip, Supplier Part Number=641-1790-1-ND, Category=Transistors, ComponentLink1Description=https://datasheet.ciiva.com:443/pdfs/VipMasterIC/IC/COMC/COMC-S-A0004994192/COMC-S-A0004994192-1.pdf?src-supplier=IHS+Markit, ComponentLink1URL=https://datasheet.ciiva.com:443/pdfs/VipMasterIC/IC/COMC/COMC-S-A0004994192/COMC-S-A0004994192-1.pdf?src-supplier=IHS+Markit, ComponentLink2Description="http://www.comchiptech.com/admin/files/product/SS8050-G RevA181526.pdf?src-supplier=Digikey", ComponentLink2URL="http://www.comchiptech.com/admin/files/product/SS8050-G RevA181526.pdf?src-supplier=Digikey", Manufacturer Part Number=SS8050-G, Pricing="1=0,24, 10=0,148, 100=0,0921, 500=0,06754, 1000=0,05958 (USD)", Reach SVHC Compliant=Yes, RoHS=Yes, RoHS Compliant=Yes, Stock=51346, Supplier=Digikey
R1 R2 R5 R8 R19 R23 R24 R25 R26 R30: library part AC0402JR-070RL, "RES SMD 0 OHM JUMPER 1/16W 0402", Case/Package=0402, LCSC Part number=C138289, Manufacturer=Yageo, Max Operating Temperature=155°C, Min Operating Temperature=-55°C, Package Height=0.32mm, Package Length=1mm, Package Shape=Rectangular, Package Width=0.5mm, Power=62.5mW, Rated Temperature=70°C, Resistor Type="FIXED RESISTOR", Supplier Part Number=311-0.0LBCT-ND, Category="Chip SMD Resistors", ComponentLink1Description=https://datasheet.ciiva.com:443/pdfs/VipMasterIC/IC/YAGO/YAGO-S-A0003597364/YAGO-S-A0003597364-1.pdf?src-supplier=IHS+Markit, ComponentLink1URL=https://datasheet.ciiva.com:443/pdfs/VipMasterIC/IC/YAGO/YAGO-S-A0003597364/YAGO-S-A0003597364-1.pdf?src-supplier=IHS+Markit, ComponentLink2Description=http://www.mouser.com/ds/2/447/yageodocoutput-1111992.pdf?src-supplier=Mouser, ComponentLink2URL=http://www.mouser.com/ds/2/447/yageodocoutput-1111992.pdf?src-supplier=Mouser, ComponentLink3Description=http://www.yageo.com/NewPortal/yageodocoutput?fileName=/pdf/R-Chip/PYu-AC_51_RoHS_L_6.pdf&src-supplier=Digikey, ComponentLink3URL=http://www.yageo.com/NewPortal/yageodocoutput?fileName=/pdf/R-Chip/PYu-AC_51_RoHS_L_6.pdf&src-supplier=Digikey, ComponentLink4Description=https://datasheet.octopart.com/AC0402JR-070RL-Yageo-datasheet-151884373.pdf?src-supplier=Newark, ComponentLink4URL=https://datasheet.octopart.com/AC0402JR-070RL-Yageo-datasheet-151884373.pdf?src-supplier=Newark, ComponentLink5Description=https://datasheet.octopart.com/AC0402JR-070RL-Yageo-datasheet-166720450.pdf?src-supplier=Future+Electronics, ComponentLink5URL=https://datasheet.octopart.com/AC0402JR-070RL-Yageo-datasheet-166720450.pdf?src-supplier=Future+Electronics, ComponentLink6Description=http://www.yageo.com/documents/recent/PYu-AC_51_RoHS_L_2_revised.pdf?src-supplier=Future+Electronics, ComponentLink6URL=http://www.yageo.com/documents/recent/PYu-AC_51_RoHS_L_2_revised.pdf?src-supplier=Future+Electronics, Construction=Chip, JESD-609 Code=e3, Manufacturer Part Number=AC0402JR-070RL, Mounting Technology="Surface Mount", Packaging="Tape and Reel", Pins=2, Pricing="1=0,1, 10=0,011, 25=0,0088, 50=0,0078, 100=0,0068, 250=0,00568, 500=0,005, 1000=0,00441, 5000=0,00336 (USD)", Reach SVHC Compliant=Yes, Reference Standard=AEC-Q200, RoHS=Yes, RoHS Compliant=Yes, Stock=129208, Supplier=Digikey, Technology="METAL GLAZE/THICK FILM", Terminal Finish=Nickel, Termination=Wraparound
R3 R4: library part RC0402FR-071KL, "RES 1K OHM 1% 1/16W 0402", Case Code (Metric)=1005, Case Code (Imperial)=0402, LCSC Part number=C106235, Manufacturer=Yageo, Max Operating Temperature=155°C, Max Power Dissipation=63mW, Min Operating Temperature=-55°C, Power Rating=62.5mW, Resistance Tolerance=1%, Resistor Type="Thick Film", Supplier Part Number=311-1.00KLRCT-ND, Temperature Coefficient=100ppm/°C, Voltage Rating=50V, Case/Package=0402, Category="Chip SMD Resistors", ComponentLink1Description=https://datasheet.ciiva.com/11819/0900766b80c66297-11819477.pdf?src-supplier=Rs, ComponentLink1URL=https://datasheet.ciiva.com/11819/0900766b80c66297-11819477.pdf?src-supplier=Rs, ComponentLink2Description=https://datasheet.ciiva.com/7983/1018594-7983502.pdf?src-supplier=Element14, ComponentLink2URL=https://datasheet.ciiva.com/7983/1018594-7983502.pdf?src-supplier=Element14, ComponentLink3Description=https://datasheet.ciiva.com/22747/1018594-22747513.pdf?src-supplier=Element14, ComponentLink3URL=https://datasheet.ciiva.com/22747/1018594-22747513.pdf?src-supplier=Element14, ComponentLink4Description=https://datasheet.ciiva.com/12666/pyu-rc0402-51-rohs-l-6-r-12666741.pdf?src-supplier=Mouser, ComponentLink4URL=https://datasheet.ciiva.com/12666/pyu-rc0402-51-rohs-l-6-r-12666741.pdf?src-supplier=Mouser, ComponentLink5Description=https://datasheet.ciiva.com/7849/1018594-7849869.pdf?src-supplier=Element14, ComponentLink5URL=https://datasheet.ciiva.com/7849/1018594-7849869.pdf?src-supplier=Element14, ComponentLink6Description=https://datasheet.ciiva.com/7849/1018594-7849871.pdf?src-supplier=Element14, ComponentLink6URL=https://datasheet.ciiva.com/7849/1018594-7849871.pdf?src-supplier=Element14, Construction=Rectangular, Depth=0.5mm, Features="Moisture Resistant", Height=0.32mm, Lead Free=5697LeadFree, Length=1mm, Manufacturer Part Number=RC0402FR-071KL, Military Standard=Not, Number of Terminations=2, Packaging="Tape and Reel", Pins=2, Pricing="1=0,1, 10=0,007, 25=0,0068, 50=0,0062, 100=0,0056, 250=0,00308, 10000=0,00204, 20000=0,002, 30000=0,00196, 50000=0,00182, 70000=0,00181 (USD)", Reach SVHC Compliant=No, RoHS=Yes, RoHS Compliant=Yes, Series=RC, Stock=449224, Supplier=Digikey, Technology="THICK FILM", Termination=SMD/SMT, Tolerance=1%, Voltage Rating (AC)=50V, Voltage Rating (DC)=50V, Width=0.5mm
R6 R7 R17 R20: library part RC0402FR-0727RL, "RES 27 OHM 1% 1/16W 0402", Case/Package=0402, LCSC Part number=C138021, Manufacturer=Yageo, Max Operating Temperature=155°C, Min Operating Temperature=-55°C, Package Height=0.35mm, Package Length=1mm, Package Shape=Rectangular, Package Width=0.5mm, Power=62.5mW, Rated Temperature=70°C, Resistor Type="FIXED RESISTOR", Supplier Part Number=YAG3086CT-ND, Temperature Coefficient (ppm/Cel)=100, Tolerance=1%, Working Voltage=50V, Additional Feature="LASER TRIMMABLE", Category="Chip SMD Resistors", ComponentLink1Description=https://datasheet.ciiva.com:443/pdfs/VipMasterIC/IC/YAGO/YAGO-S-A0008145938/YAGO-S-A0008145938-1.pdf?src-supplier=IHS+Markit, ComponentLink1URL=https://datasheet.ciiva.com:443/pdfs/VipMasterIC/IC/YAGO/YAGO-S-A0008145938/YAGO-S-A0008145938-1.pdf?src-supplier=IHS+Markit, ComponentLink2Description=https://datasheet.ciiva.com/11808/0900766b80c66297-11808450.pdf?src-supplier=Rs, ComponentLink2URL=https://datasheet.ciiva.com/11808/0900766b80c66297-11808450.pdf?src-supplier=Rs, ComponentLink3Description=https://datasheet.ciiva.com/7849/1018594-7849927.pdf?src-supplier=Element14, ComponentLink3URL=https://datasheet.ciiva.com/7849/1018594-7849927.pdf?src-supplier=Element14, ComponentLink4Description=https://datasheet.ciiva.com/7849/1018594-7849926.pdf?src-supplier=Element14, ComponentLink4URL=https://datasheet.ciiva.com/7849/1018594-7849926.pdf?src-supplier=Element14, ComponentLink5Description=https://datasheet.ciiva.com/17044/pyu-rc0402-51-rohs-l-6-17044345.pdf?src-supplier=Future+Electronics, ComponentLink5URL=https://datasheet.ciiva.com/17044/pyu-rc0402-51-rohs-l-6-17044345.pdf?src-supplier=Future+Electronics, ComponentLink6Description=https://datasheet.ciiva.com/15189/getdatasheetpartid-327852-15189402.pdf?src-supplier=Verical, ComponentLink6URL=https://datasheet.ciiva.com/15189/getdatasheetpartid-327852-15189402.pdf?src-supplier=Verical, Construction=Chip, JESD-609 Code=e3, Manufacturer Part Number=RC0402FR-0727RL, Mounting Technology="Surface Mount", Packaging="Tape and Reel", Pins=2, Pricing="1=0,1, 10=0,007, 25=0,0068, 50=0,0062, 100=0,0051, 250=0,00308, 10000=0,00204, 20000=0,002, 30000=0,00196, 50000=0,00182, 70000=0,00181 (USD)", Reach SVHC Compliant=Yes, RoHS=Yes, RoHS Compliant=Yes, Stock=262466, Supplier=Digikey, Technology="METAL GLAZE/THICK FILM", Terminal Finish=Nickel, Termination=Wraparound
R9: library part RC0402FR-074K7L, "RES 4.7K OHM 1% 1/16W 0402", Case/Package=0402, LCSC Part number=C105871, Manufacturer=Yageo, Max Operating Temperature=155°C, Min Operating Temperature=-55°C, Package Height=0.35mm, Package Length=1mm, Package Shape=Rectangular, Package Width=0.5mm, Power=62.5mW, Rated Temperature=70°C, Resistor Type="FIXED RESISTOR", Supplier Part Number=311-4.7KLRCT-ND, Temperature Coefficient (ppm/Cel)=100, Tolerance=1%, Working Voltage=50V, Additional Feature="LASER TRIMMABLE", Category="Chip SMD Resistors", ComponentLink1Description=https://datasheet.ciiva.com:443/pdfs/VipMasterIC/IC/YAGO/YAGO-S-A0008145938/YAGO-S-A0008145938-1.pdf?src-supplier=IHS+Markit, ComponentLink1URL=https://datasheet.ciiva.com:443/pdfs/VipMasterIC/IC/YAGO/YAGO-S-A0008145938/YAGO-S-A0008145938-1.pdf?src-supplier=IHS+Markit, ComponentLink2Description=https://datasheet.ciiva.com/22661/1686128-22661342.pdf?src-supplier=Element14, ComponentLink2URL=https://datasheet.ciiva.com/22661/1686128-22661342.pdf?src-supplier=Element14, ComponentLink3Description=https://datasheet.ciiva.com/7850/1018594-7850022.pdf?src-supplier=Element14, ComponentLink3URL=https://datasheet.ciiva.com/7850/1018594-7850022.pdf?src-supplier=Element14, ComponentLink4Description=https://datasheet.ciiva.com/7850/1018594-7850023.pdf?src-supplier=Element14, ComponentLink4URL=https://datasheet.ciiva.com/7850/1018594-7850023.pdf?src-supplier=Element14, ComponentLink5Description=https://datasheet.ciiva.com/15215/getdatasheetpartid-328119-15215035.pdf?src-supplier=Verical, ComponentLink5URL=https://datasheet.ciiva.com/15215/getdatasheetpartid-328119-15215035.pdf?src-supplier=Verical, Construction=Chip, JESD-609 Code=e3, Manufacturer Part Number=RC0402FR-074K7L, Mounting Technology="Surface Mount", Packaging="Tape and Reel", Pins=2, Pricing="1=0,1, 10=0,02, 25=0,014, 50=0,0112, 100=0,009, 250=0,00688, 500=0,00566, 1000=0,00474, 5000=0,00328, 10000=0,00286, 20000=0,00253, 30000=0,00237, 50000=0,0022, 70000=0,0021, 100000=0,002, 120000=0,00196, 240000=0,00182, 250000=0,00181 (USD)", Reach SVHC Compliant=Yes, RoHS=Yes, RoHS Compliant=Yes, Stock=325792, Supplier=Digikey, Technology="METAL GLAZE/THICK FILM", Terminal Finish=Nickel, Termination=Wraparound
R10 R13 R16 R21 R22: library part AC0402FR-0710KL, "RES SMD 10K OHM 1% 1/16W 0402", Case/Package=0402, LCSC Part number=C144807, Manufacturer=Yageo, Max Operating Temperature=155°C, Min Operating Temperature=-55°C, Package Height=0.32mm, Package Length=1mm, Package Shape=Rectangular, Package Width=0.5mm, Power=62.5mW, Rated Temperature=70°C, Resistor Type="FIXED RESISTOR", Supplier Part Number=YAG3436CT-ND, Temperature Coefficient (ppm/Cel)=100, Tolerance=1%, Working Voltage=50V, Additional Feature="LASER TRIMMABLE", Category="Chip SMD Resistors", ComponentLink1Description=https://datasheet.ciiva.com:443/pdfs/VipMasterIC/IC/YAGO/YAGO-S-A0003597364/YAGO-S-A0003597364-1.pdf?src-supplier=IHS+Markit, ComponentLink1URL=https://datasheet.ciiva.com:443/pdfs/VipMasterIC/IC/YAGO/YAGO-S-A0003597364/YAGO-S-A0003597364-1.pdf?src-supplier=IHS+Markit, ComponentLink2Description=https://datasheet.ciiva.com/12656/pyu-ac-51-rohs-l-2-12656634.pdf?src-supplier=Mouser, ComponentLink2URL=https://datasheet.ciiva.com/12656/pyu-ac-51-rohs-l-2-12656634.pdf?src-supplier=Mouser, Construction=Chip, JESD-609 Code=e3, Manufacturer Part Number=AC0402FR-0710KL, Mounting Technology="Surface Mount", Packaging="Tape and Reel", Pins=2, Pricing="1=0,1, 10=0,009, 25=0,0088, 50=0,0082, 100=0,0076, 250=0,00712, 500=0,00578, 5000=0,00407, 10000=0,00204 (USD)", Reach SVHC Compliant=Yes, Reference Standard=AEC-Q200, RoHS=Yes, RoHS Compliant=Yes, Supplier=Digikey, Technology="METAL GLAZE/THICK FILM", Terminal Finish=Nickel, Termination=Wraparound
R11 R12 R14 R15: library part AC0402FR-075K1L, "RES SMD 5.1K OHM 1% 1/16W 0402", Case/Package=0402, LCSC Part number=C144745, Manufacturer=Yageo, Max Operating Temperature=155°C, Min Operating Temperature=-55°C, Package Height=0.32mm, Package Length=1mm, Package Shape=Rectangular, Package Width=0.5mm, Power=62.5mW, Rated Temperature=70°C, Resistor Type="FIXED RESISTOR", Supplier Part Number=YAG3503CT-ND, Temperature Coefficient (ppm/Cel)=100, Tolerance=1%, Working Voltage=50V, Additional Feature="LASER TRIMMABLE", Category="Chip SMD Resistors", ComponentLink1Description=https://datasheet.ciiva.com:443/pdfs/VipMasterIC/IC/YAGO/YAGO-S-A0003597364/YAGO-S-A0003597364-1.pdf?src-supplier=IHS+Markit, ComponentLink1URL=https://datasheet.ciiva.com:443/pdfs/VipMasterIC/IC/YAGO/YAGO-S-A0003597364/YAGO-S-A0003597364-1.pdf?src-supplier=IHS+Markit, ComponentLink2Description=https://datasheet.octopart.com/AC0402FR-075K1L-Yageo-datasheet-166720450.pdf?src-supplier=Future+Electronics, ComponentLink2URL=https://datasheet.octopart.com/AC0402FR-075K1L-Yageo-datasheet-166720450.pdf?src-supplier=Future+Electronics, ComponentLink3Description=http://www.yageo.com/documents/recent/PYu-AC_51_RoHS_L_2_revised.pdf?src-supplier=Future+Electronics, ComponentLink3URL=http://www.yageo.com/documents/recent/PYu-AC_51_RoHS_L_2_revised.pdf?src-supplier=Future+Electronics, ComponentLink4Description=http://www.yageo.com/NewPortal/yageodocoutput?fileName=/pdf/R-Chip/PYu-AC_51_RoHS_L_6.pdf&src-supplier=Digikey, ComponentLink4URL=http://www.yageo.com/NewPortal/yageodocoutput?fileName=/pdf/R-Chip/PYu-AC_51_RoHS_L_6.pdf&src-supplier=Digikey, ComponentLink5Description=https://datasheet.octopart.com/AC0402FR-075K1L-Yageo-datasheet-178509465.pdf?src-supplier=Farnell, ComponentLink5URL=https://datasheet.octopart.com/AC0402FR-075K1L-Yageo-datasheet-178509465.pdf?src-supplier=Farnell, ComponentLink6Description=https://datasheet.octopart.com/AC0402FR-075K1L-Yageo-datasheet-178509465.pdf?src-supplier=Element14, ComponentLink6URL=https://datasheet.octopart.com/AC0402FR-075K1L-Yageo-datasheet-178509465.pdf?src-supplier=Element14, ComponentLink7Description=https://datasheet.octopart.com/AC0402FR-075K1L-Yageo-datasheet-178509465.pdf?src-supplier=Newark, ComponentLink7URL=https://datasheet.octopart.com/AC0402FR-075K1L-Yageo-datasheet-178509465.pdf?src-supplier=Newark, Construction=Chip, JESD-609 Code=e3, Manufacturer Part Number=AC0402FR-075K1L, Mounting Technology="Surface Mount", Packaging="Tape and Reel", Pins=2, Pricing="1=0,1, 10=0,009, 25=0,008, 50=0,0072, 100=0,0066, 250=0,00576, 500=0,00406 (USD)", Reach SVHC Compliant=Yes, Reference Standard=AEC-Q200, RoHS=Yes, RoHS Compliant=Yes, Stock=22431, Supplier=Digikey, Technology="METAL GLAZE/THICK FILM", Terminal Finish=Nickel, Termination=Wraparound
SW1 SW2: "SWITCH TACTILE SPST-NO 0.05A 12V", Contact Current(DC)-Max=50mA, Contact DC Max Rating R Load=0.05A@12VDC, Contact Resistance=0.1mR, Contact Voltage(DC)-Max=12V, Dielectric Withstand Volts=250VACV, LCSC Part number=C221869, Manufacturer="ITT C&K", Manufacturer Series=PTS645, Max Operating Temperature=60°C, Min Operating Temperature=-20°C, Supplier Part Number=CKN9085CT-ND, Insulation Resistance=100GR, Actuator Type=Pushbutton, Body Breadth=5.9944mm, Body Height=3.4544mm, Body Length or Diameter=5.9944mm, Category="Tactile Switches", ComponentLink1Description=https://datasheet.ciiva.com:443/pdfs/VipMasterIC/IC/CKCI/CKCI-S-A0001796527/CKCI-S-A0001796842-1.pdf?src-supplier=IHS+Markit, ComponentLink1URL=https://datasheet.ciiva.com:443/pdfs/VipMasterIC/IC/CKCI/CKCI-S-A0001796527/CKCI-S-A0001796842-1.pdf?src-supplier=IHS+Markit, ComponentLink2Description=https://datasheet.ciiva.com/29903/getdatasheetpartid-773702-29903807.pdf?src-supplier=Verical, ComponentLink2URL=https://datasheet.ciiva.com/29903/getdatasheetpartid-773702-29903807.pdf?src-supplier=Verical, ComponentLink3Description=https://datasheet.ciiva.com/14920/pts645-14920741.pdf?src-supplier=Digikey, ComponentLink3URL=https://datasheet.ciiva.com/14920/pts645-14920741.pdf?src-supplier=Digikey, ComponentLink4Description=https://datasheet.ciiva.com/22637/1707731-22637356.pdf?src-supplier=Element14, ComponentLink4URL=https://datasheet.ciiva.com/22637/1707731-22637356.pdf?src-supplier=Element14, JESD-609 Code=e4, Manufacturer Part Number=PTS645SH50SMTR92LFS, Mounting Technology="Surface Mount", PCB Hole Count=4, Pricing="1=0,35, 10=0,3, 25=0,2804, 100=0,251, 250=0,23256, 500=0,21948 (USD)", Reach SVHC Compliant=Yes, RoHS=Yes, RoHS Compliant=Yes, Stock=9529, Supplier=Digikey, Switch Action=MOMENTARY, Switch Function=SPST, Switch Type=Keypad, Terminal Finish=Silver, Terminal Length=0.138inch, Termination=Solder
U1: library part ESP32-S3-MINI-1-N8_1, "SMD Module, ESP32-S3FN8, 8 mb Sp", LCSC Part number=C2913206, Manufacturer="Espressif Systems", Supplier Part Number=1965-ESP32-S3-MINI-1-N8CT-ND, Category=LDO, Manufacturer Part Number=ESP32-S3-MINI-1-N8, Pricing="1=3.1 (USD)", RoHS=No, Stock=2024, Supplier=Digikey